# Altium PCB MotorDriver.PcbDoc
Units mm, origin at the board's own origin, x right, y up, seen from the top; angles counter-clockwise.
Board outline 75 x 53 mm, 2 copper layers (Top Layer, Bottom Layer); 17 components, 13 nets, 49 pads, 0 vias.
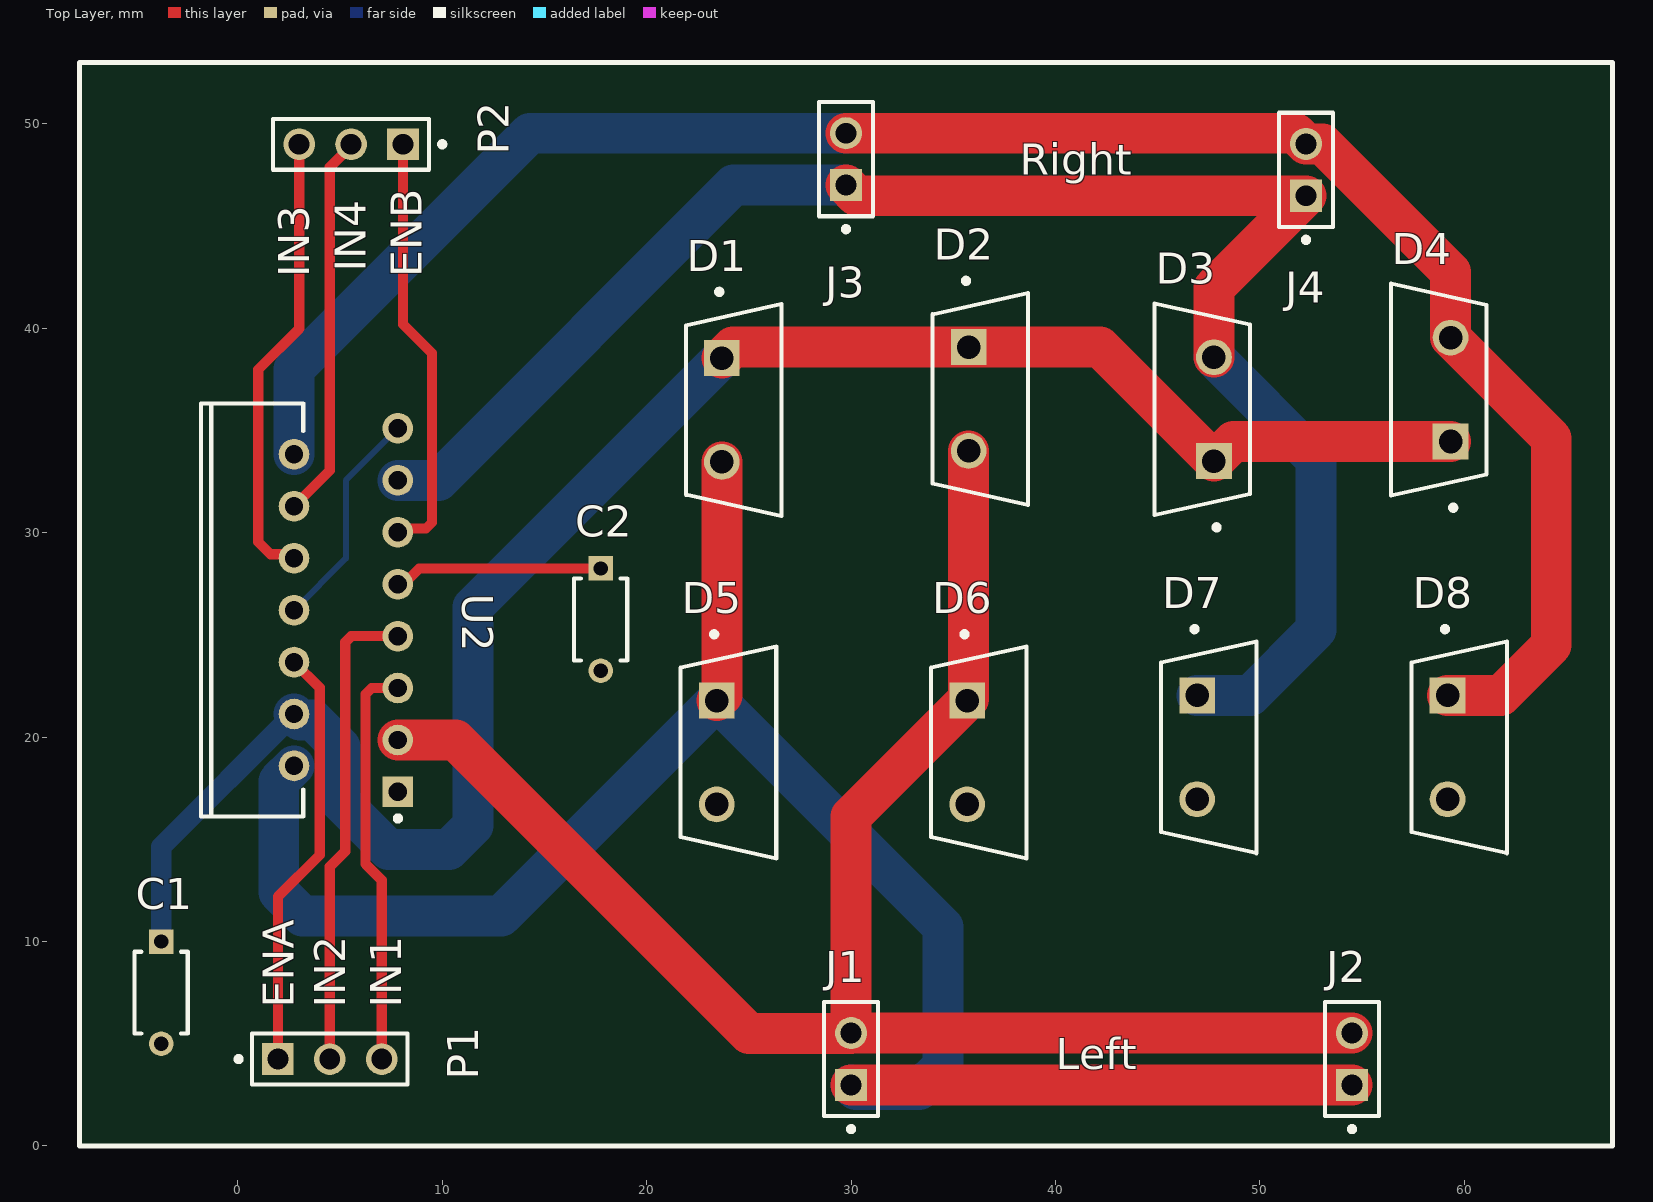
[diagram p0: Top Layer view]
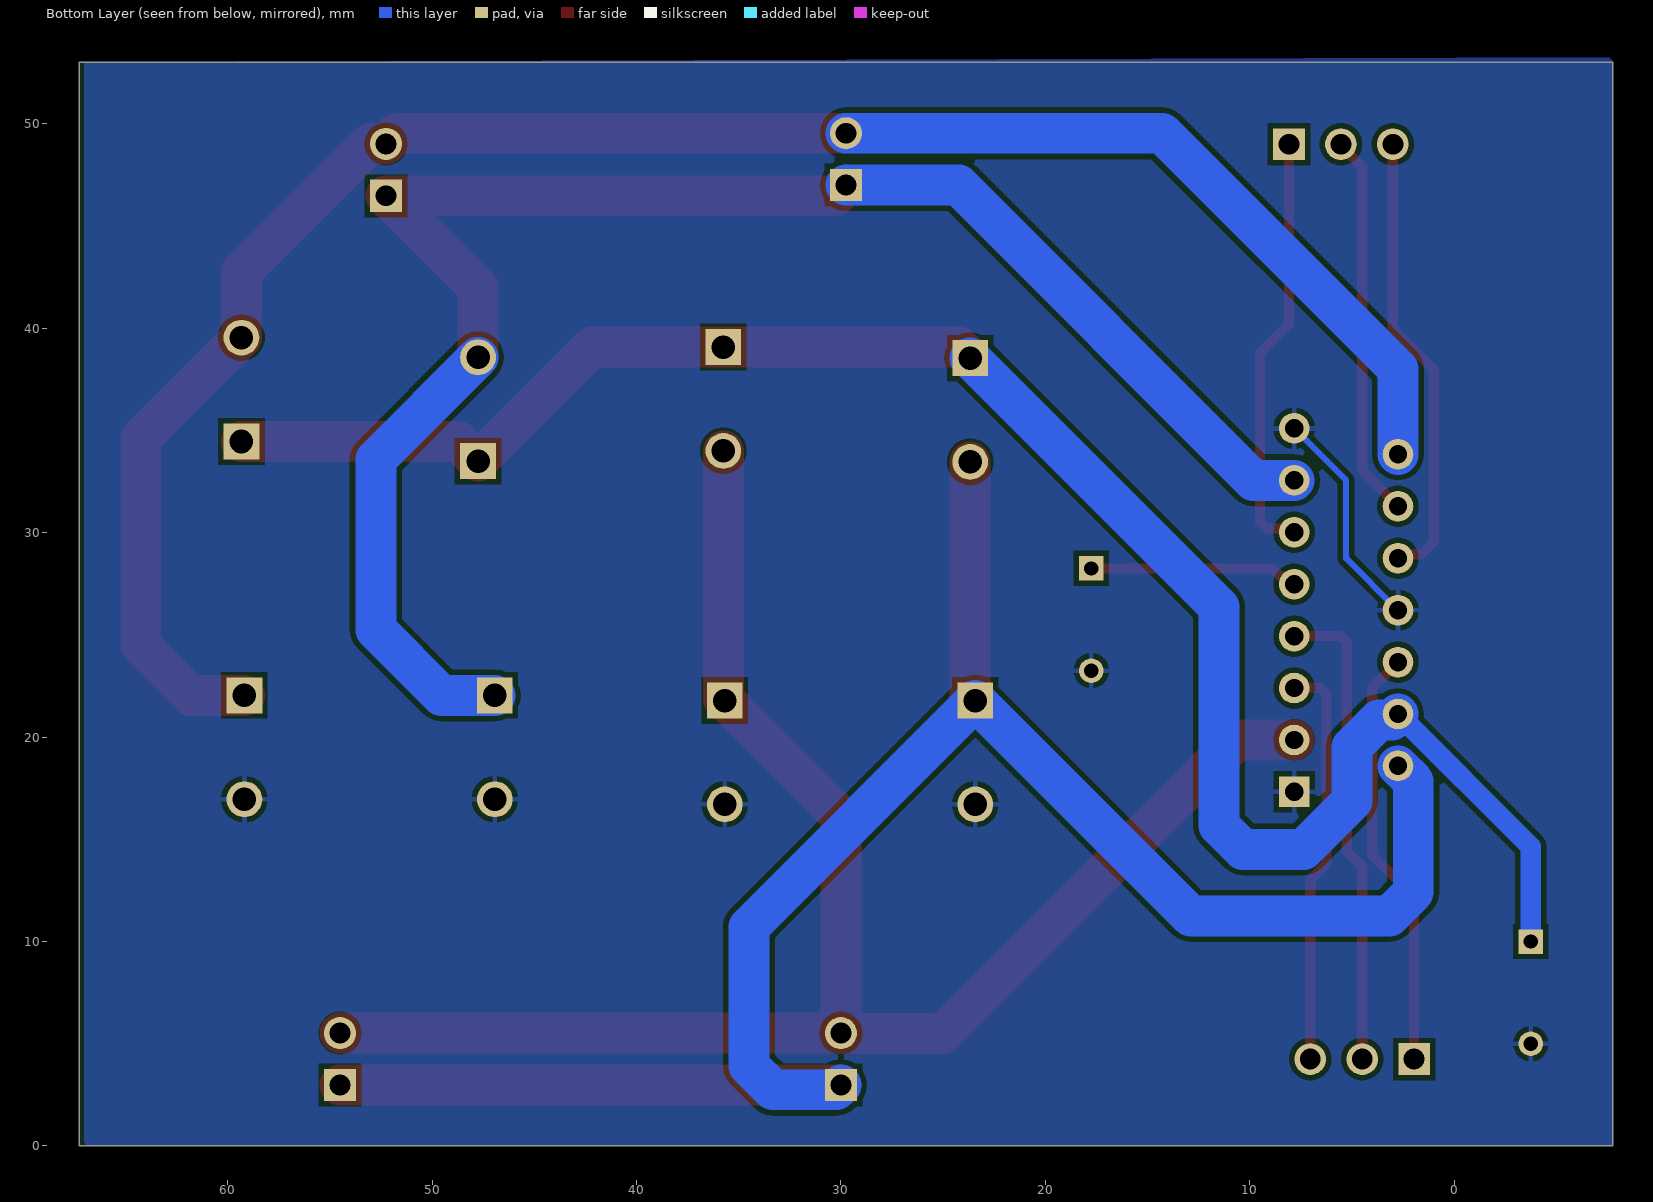
[diagram p1: Bottom Layer view, seen from below]
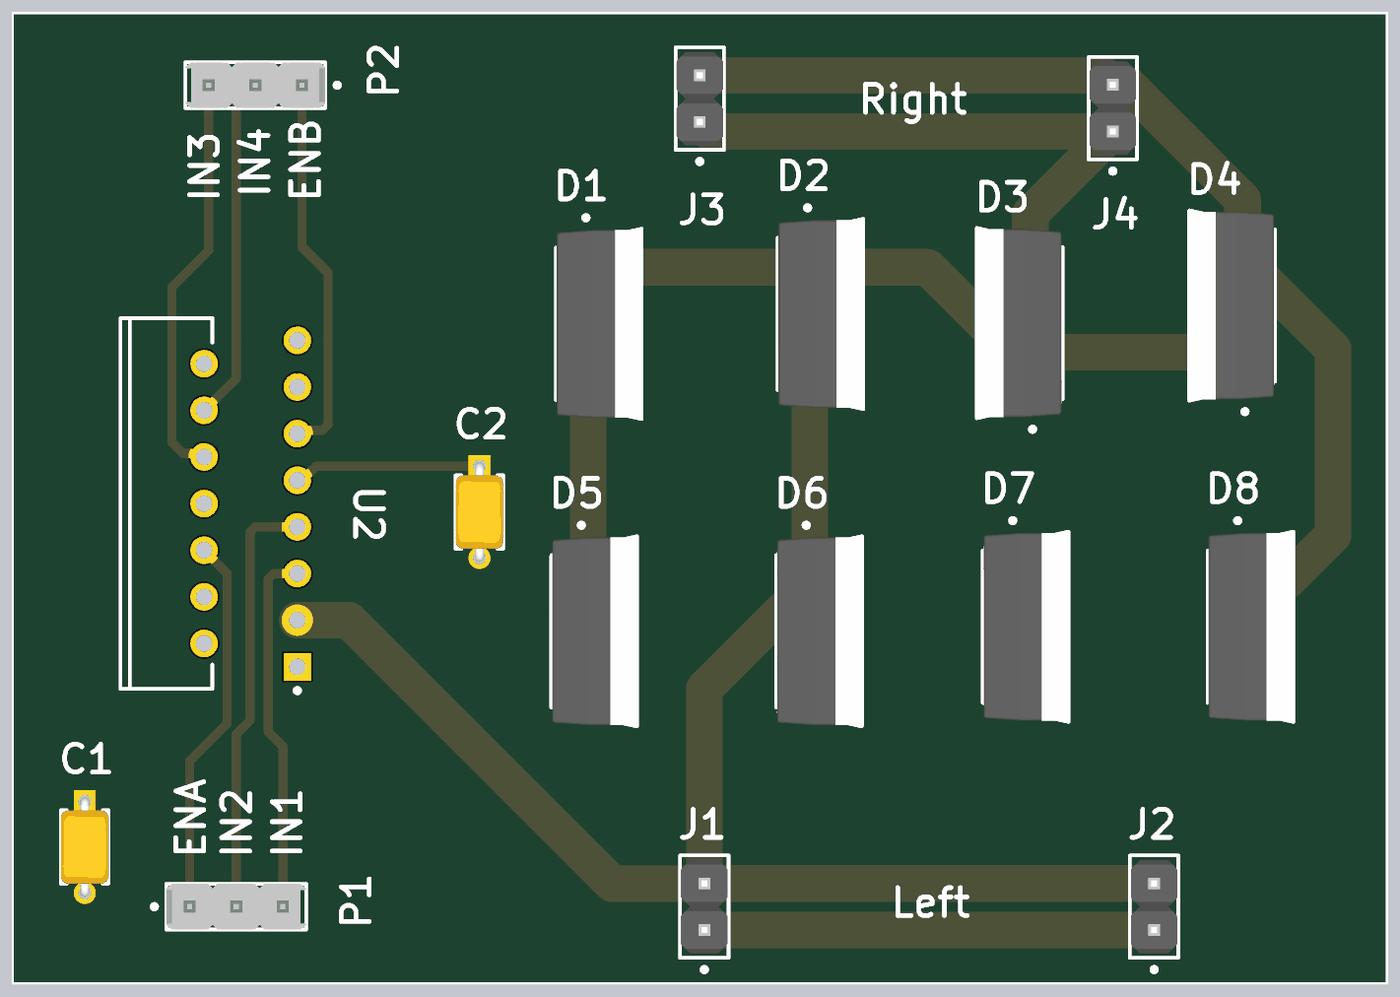
[diagram p2: 3D render of the assembled board from above, using the file's embedded part models]

## Layer stack, top to bottom
Top Solder: solder mask 0.0102, Solder Resist, Dk 3.5
Top Layer: signal copper 0.0356
Dielectric 1: dielectric 0.32, FR-4, Dk 4.8
Bottom Layer: signal copper 0.0356
Bottom Solder: solder mask 0.0102, Solder Resist, Dk 3.5

## Board outline
-7.75,0 -7.75,53 67.25,53 67.25,0

## Design rules (kind name [scope] priority, off if disabled: settings)
Clearance [All] p1: gap=0.254 ignorepadtopadclearanceinfootprint=FALSE
PolygonConnect [All] p1: connectstyle=Relief reliefconductorwidth=0.254 reliefentries=4 polygonreliefangle="90 Angle" airgapwidth=0.254
RoutingVias [All] p1: holewidth=0.711 width=1.27 viastyle="Through Hole" minholewidth=0.711 minwidth=1.27 maxholewidth=0.711 maxwidth=1.27
SolderMaskExpansion [All] p1: expansion=0.102 istentingtop=FALSE
SupplyNets "Schematic Supply Nets_2" [InNet('GND')] p1: voltage=0.000
SupplyNets "Schematic Supply Nets_1" [InNet('+5v')] p2: voltage=0.000
SupplyNets "Schematic Supply Nets" [InNet('+9v')] p3: voltage=0.000
Width [All] p1: maxlimit=2 minlimit=0.254 preferedwidth=0.254
30 further rules are at their usual default settings.

## Components (designator, comment, footprint, x,y, rotation, side; value= is the part's Value field where it differs from the comment)
C1 "100nF" FP-K15H5-MFG -3.75,7.5 r270 top
C2 "100nF" FP-K15H5-MFG 17.75,25.75 r270 top
D1 "" FP-340BA-MFG 24.25,36 r0 top
D2 "" FP-340BA-MFG 36.323,36.54 r0 top
D3 "" FP-340BA-MFG 47.178,36.04 r180 top
D4 "" FP-340BA-MFG 58.75,37 r180 top
D5 "" FP-340BA-MFG 24,19.25 r0 top
D6 "" FP-340BA-MFG 36.25,19.25 r0 top
D7 "" FP-340BA-MFG 47.5,19.5 r0 top
D8 "MBR760" FP-340BA-MFG 59.75,19.5 r0 top
J1 "Motor 1" FP-M20-9990246-MFG 30,4.25 r90 top
J2 "Motor 2" FP-M20-9990246-MFG 54.5,4.25 r90 top
J3 "Motor 3" FP-M20-9990246-MFG 29.75,48.27 r90 top
J4 "Motor 4" FP-M20-9990246-MFG 52.25,47.75 r90 top
P1 "" MOLX-22-28-4033_V 4.5,4.25 r0 top
P2 "" MOLX-22-28-4033_V 5.54,49 r180 top
U2 "L298N" STM-FM-15 5.29,26.21 r180 top

## Footprints (in the part's own frame and the unit in brackets; to place one, negate y for a bottom-side part, rotate by r counter-clockwise, add the part's x,y. Pads: shape width x height; smd on the part's side, far side on the other; paste and mask are expansions set on the pad)
FP-340BA-MFG [mm]
  rect 1.75x1.75 hole 1.15 paste-2539.97 mask+0: 1(-0.573,2.54)
  round 1.75 hole 1.15 paste-2539.97 mask+0: 2(-0.573,-2.54)
  silkscreen extent -2.34,-5.18 2.34,5.9, body extent -2.44,-5.28 2.44,5.28, height 0.25
FP-K15H5-MFG [mm]
  rect 1.2x1.2 hole 0.7 paste-2539.97 mask+0: 1(-2.5,0)
  round 1.2 hole 0.7 paste-2539.97 mask+0: 2(2.5,0)
  silkscreen extent -2,-1.3 2,1.3, body extent -3.2,-1.4 3.2,1.4, height 0.25
FP-M20-9990246-MFG [mm]
  rect 1.57x1.57 hole 1.02 paste-2539.97 mask+0: 1(-1.27,0)
  round 1.57 hole 1.02 paste-2539.97 mask+0: 2(1.27,0)
  silkscreen extent -3.55,-1.32 2.79,1.32, body extent -2.89,-1.42 2.89,1.42, height 0.25
MOLX-22-28-4033_V [mm] "THD, 3-Leads, Body 7.62x2.49mm, Pitch 2.54mm"
  rect 1.55x1.55 hole 1.02: 1(-2.54,0)
  round 1.55 hole 1.02: 2(0,0) 3(2.54,0)
  silkscreen extent -4.58,-1.24 3.81,1.24, body extent -3.81,-1.24 3.81,1.24, height 8.38
STM-FM-15 [mm] "FM, 15-Leads, Body 20.2x5mm, Pitch 1.27mm"
  rect 1.5x1.5 hole 0.9: 1(-2.54,8.89)
  round 1.5 hole 0.9: 2(2.54,7.62) 3(-2.54,6.35) 4(2.54,5.08) 5(-2.54,3.81) 6(2.54,2.54) 7(-2.54,1.27) 8(2.54,0) 9(-2.54,-1.27) 10(2.54,-2.54) 11(-2.54,-3.81) 12(2.54,-5.08) 13(-2.54,-6.35) 14(2.54,-7.62) 15(-2.54,-8.89)
  silkscreen extent -2.67,-10.1 7.09,10.31, body extent -2.8,-10.1 7.09,10.1, height 21

## Part data
C1 C2: library part CMP-02417-000078-1, "CAP CER 0.1UF 50V X7R RADIAL", Case/Package=Dipped, Dielectric=X7R, Dielectric Material=Ceramic, Max Operating Temperature=125°C, Min Operating Temperature=-55°C, Package Quantity=1, Tolerance=10%, Voltage=50V, Capacitance=100nF, Construction=RADIAL, Depth=2.5mm, Diameter=500um, Height=4mm, Height - Seated (Max)=0.257inch, Lead Diameter=0.5mm, Lead Free="Lead Free", Lead Length=30mm, Lead Pitch=5mm, Lead/Base Style="Formed Leads", Length=4mm, Mount="Through Hole", Packaging="Tape and Reel", Radiation Hardening=No, RoHS Compliant=Yes, Series=K, Termination=Radial, Thickness=2.6mm, Voltage Rating=50V, Voltage Rating (DC)=50V, Weight=0.005644oz, Width=2.5mm
D1 D2 D3 D4 D5 D6 D7 D8: library part CMP-00278-20838014-1, "MBR760 Diode Schottky 60V 7.5A 2-Pin(2+Tab) TO-220AC Rail", Average Rectified Current=7.5A, Case/Package=TO-220-2, Forward Voltage=750mV, Manufacturer Lifecycle Status=ACTIVE, Max Forward Surge Current (Ifsm)=150A, Max Operating Temperature=150°C, Max Repetitive Reverse Voltage (Vrrm)=60V, Max Reverse Leakage Current=500µA, Min Operating Temperature=-65°C, Current Rating=7.5A, Element Configuration=Single, Forward Current=7.5A, Lead Free="Lead Free", Lifecycle Status=Production, Max Reverse Voltage (DC)=60V, Max Surge Current=150A, Mount="Through Hole", NexarPartId=20838014, Number of Pins=2, Output Current=7.5A, Peak Non-Repetitive Surge Current=150A, Peak Reverse Current=500µA, Polarity=Standard, Radiation Hardening=No, RoHS=Compliant, Voltage Rating (DC)=60V, Weight=2.16g
J1 J2 J3 J4: library part CMP-15831-000009-1, "CONN HEADER VERT 2POS 2.54MM", Current Rating=3A, Manufacturer=Harwin, Manufacturer Part Number=M20-9990246, Temperature="-40°C to +105°C", Temperature Range High=+105°C, Temperature Range Low=-40°C, Automotive=No, Category=Conn, ComponentLink2Description=Datasheet, ComponentLink2URL=https://cdn.harwin.com/pdfs/M20-999.pdf, Conn Gender=Male, Conn Orientation=Vertical, Contact Material=Tin,Nickel, Device Class L1=Connectors, Device Class L2="Headers and Wire Housings", Device Class L3=unset, Digikey Description="CONN HEADER VERT 2POS 2.54MM", Height=8.99mm, Lead Free=Yes, Mouser Description="2.54mm (0.1\") Pitch SIL Vertical PC Tail Pin Header, 6.1mm mating pin height, tin, 2 contacts", Number of Contacts=2, Number of Rows=1, Octopart=https://octopart.com/m20-9990246-harwin-2590635, Package=M20-9990246, Pitch=2.54mm, RoHS=TRUE
P1 P2: library part CMP-1676-00001-5, "Male Header, Pitch 2.54 mm, 1 x 3 Position, Height 8.38 mm, Tail Length 3.18 mm, RoHS, Bulk", Colour=Black, Current Rating="4 A", Manufacturer=Molex, Max Operating Temperature="75 degC", Min Operating Temperature="0 degC", Package Quantity=1, Voltage Rating="250 V", ComponentLink1Description="Manufacturer URL", ComponentLink1URL=http://www.molex.com/, ComponentLink2Description=Datasheet, ComponentLink2URL=http://www.molex.com/pdm_docs/sd/022284033_sd.pdf, Contact Finish=Gold, Contact Material=Brass, Contact Plating=Gold, DatasheetVersion="Rev. G, 01/2012", Height="8.38 mm", Lead Pitch="0.1 inch", Length="7.62 mm", Mount="Through Hole", Mounting Technology="Through Hole", PackageDescription="Male Header, Pitch 2.54 mm, 1 x 3 Position, Height 8.38 mm, Tail Length 3.18 mm", PackageReference=22-28-4033, Packaging=Bulk, Pins=3, REACH SVHC=Unknown, RoHSCompliant=true, Rows=1
U2: library part CMP-2000-06526-1, "Dual Full-Bridge Driver, 4.8 to 46 V, -40 to 150 degC, 15-Pin FM (MW 15L), RoHS, Tube", Driver Case Style=Multiwatt, Manufacturer=STMicroelectronics, Operating Temperature Max=130°C, Operating Temperature Min=-25°C, Output Current=2A, Output Voltage=46V, Package Description="15-Pin Flange Mount, Body 5 x 19.6 mm, Pitch 1.27 mm", Package Reference=FM-15, PartNumber=L298, Supply Voltage Max=7V, Supply Voltage Min=4.5V, Automotive Qualification Standard=-, Datasheet URL=https://datasheet.ciiva.com/15109/getdatasheetpartid-50682-15109332.pdf, Datasheet Version=01/2000, Manufacturer URL=http://www.st.com/, Motor Type=FullBridge, Mounting Technology=ThroughHole, MSL=-, No. of Outputs=4Outputs, No. of Pins=15Pins, Packaging=Each, Product Range=-, SVHC=NoSVHC(17-Dec-2015)

## Nets (pads, with @x,y where several pads share a name; then routed paths per layer and width w, separated by ;. In a path a pad name is that pad's centre, name@x,y a point inside that pad or via, vN(x,y) a via of type N, cw(c..) or ccw(c..) an arc to the next point about the centre after c; other vN are vias at no path point)
+5v: C2.1 U2.9 | length 10.2
  Top Layer w0.5: U2.9 8.101,27.48 8.871,28.25 C2.1
+9v: C1.1 D1.1 D2.1 D3.1 D4.1 U2.4 | length 93.8
  Top Layer w2: D1.1 24.218,39.08 D2.1 42.17,39.08 D3.1 48.71,34.46 D4.1
  Bottom Layer w1: C1.1 -3.75,14.63 U2.4
  Bottom Layer w2: U2.4 3.036,20.844 3.684,20.844 5.004,19.524 5.004,16.873 7.373,14.504 10.328,14.504 11.5,15.676 11.5,26.362 D1.1
GND: C1.2 C2.2 D5.2 D6.2 D7.2 D8.2 U2.1 U2.8 U2.15 | length 11
  Bottom Layer w0.3: U2.8 5.29,28.75 5.29,32.56 U2.15
NetD1_2: D1.2 D5.1 J1.1 J2.1 U2.2 | length 96.6
  Top Layer w2: D5.1 23.677,22.04 D1.2 ; J1.1 J2.1
  Bottom Layer w2: U2.2 2,17.84 2,12.422 3.172,11.25 12.888,11.25 D5.1 34.5,10.717 34.5,3.922 33.328,2.75 30.23,2.75 J1.1
NetD2_2: D2.2 D6.1 J1.2 J2.2 U2.3 | length 83.5
  Top Layer w2: U2.3 10.64,19.86 25,5.5 29.98,5.5 J1.2 ; D2.2 35.75,21.862 D6.1 30,16.113 J1.2 ; J2.2 J1.2
NetD3_2: D3.2 D7.1 J3.1 J4.1 U2.13 | length 82.9
  Top Layer w2: J3.1 30.27,46.48 J4.1 47.75,41.98 D3.2
  Bottom Layer w2: U2.13 9.81,32.56 24.25,47 J3.1 ; D7.1 49.54,22.04 52.75,25.25 52.75,33.58 D3.2
NetD4_2: D4.2 D8.1 J3.2 J4.2 U2.14 | length 94.7
  Top Layer w2: J3.2 51.73,49.54 J4.2 53.053,49.02 59.323,42.751 D4.2 64.25,34.612 64.25,24.5 61.79,22.04 D8.1
  Bottom Layer w2: U2.14 2.75,38 14.29,49.54 J3.2
NetP1_1: P1.1 U2.6 | length 20.8
  Top Layer w0.5: P1.1 1.96,12.19 4.004,14.234 4.004,22.416 U2.6
NetP1_2: P1.2 U2.7 | length 23.4
  Top Layer w0.5: P1.2 4.5,13.664 5.25,14.414 5.25,24.647 5.543,24.94 U2.7
NetP1_3: P1.3 U2.5 | length 19.9
  Top Layer w0.5: P1.3 7.04,12.997 6.25,13.787 6.25,22.107 6.543,22.4 U2.5
NetP2_1: P2.1 U2.11 | length 21
  Top Layer w0.5: U2.11 8.017,30.207 9.207,30.207 9.5,30.5 9.5,38.777 8.08,40.197 P2.1
NetP2_2: P2.2 U2.12 | length 18.9
  Top Layer w0.5: U2.12 4.5,33.04 4.5,47.883 5.54,48.923 P2.2
NetP2_3: P2.3 U2.10 | length 22.4
  Top Layer w0.5: U2.10 2.559,28.941 1.602,28.941 1,29.543 1,37.983 3,39.983 P2.3

## Polygon pours and split planes (outlines as drawn)
GND on Bottom Layer "GND_L02_P001" (solid, pour order 1): -7.75,53.25 -7.75,0 67.25,0 67,0.25 67,53

## Silkscreen, mask and mechanical layers (free items; w line width, h text height)
Top Overlay:
  the board outline again, w0.254
  text "Right" at 38.254,47.512 h1.52
  text "IN4" at 6.246,42.754 h1.52 r90
  text "IN3" at 3.496,42.504 h1.52 r90
  text "ENB" at 8.996,42.504 h1.52 r90
  text "ENA" at 2.746,6.754 h1.52 r90
  text "IN2" at 5.246,6.754 h1.52 r90
  text "IN1" at 7.996,6.754 h1.52 r90
  text "Left" at 40.004,3.754 h1.52